# Altium PCB pcb_multilayer.pcbdoc (part 3 of 3)
Units mil, origin at the board's own origin, x right, y up, seen from the top; angles counter-clockwise.
Board outline 8907.73 x 8667.62 mil, 2 copper layers (Top Layer, Bottom Layer); 214 components, 207 nets, 845 pads, 446 vias.
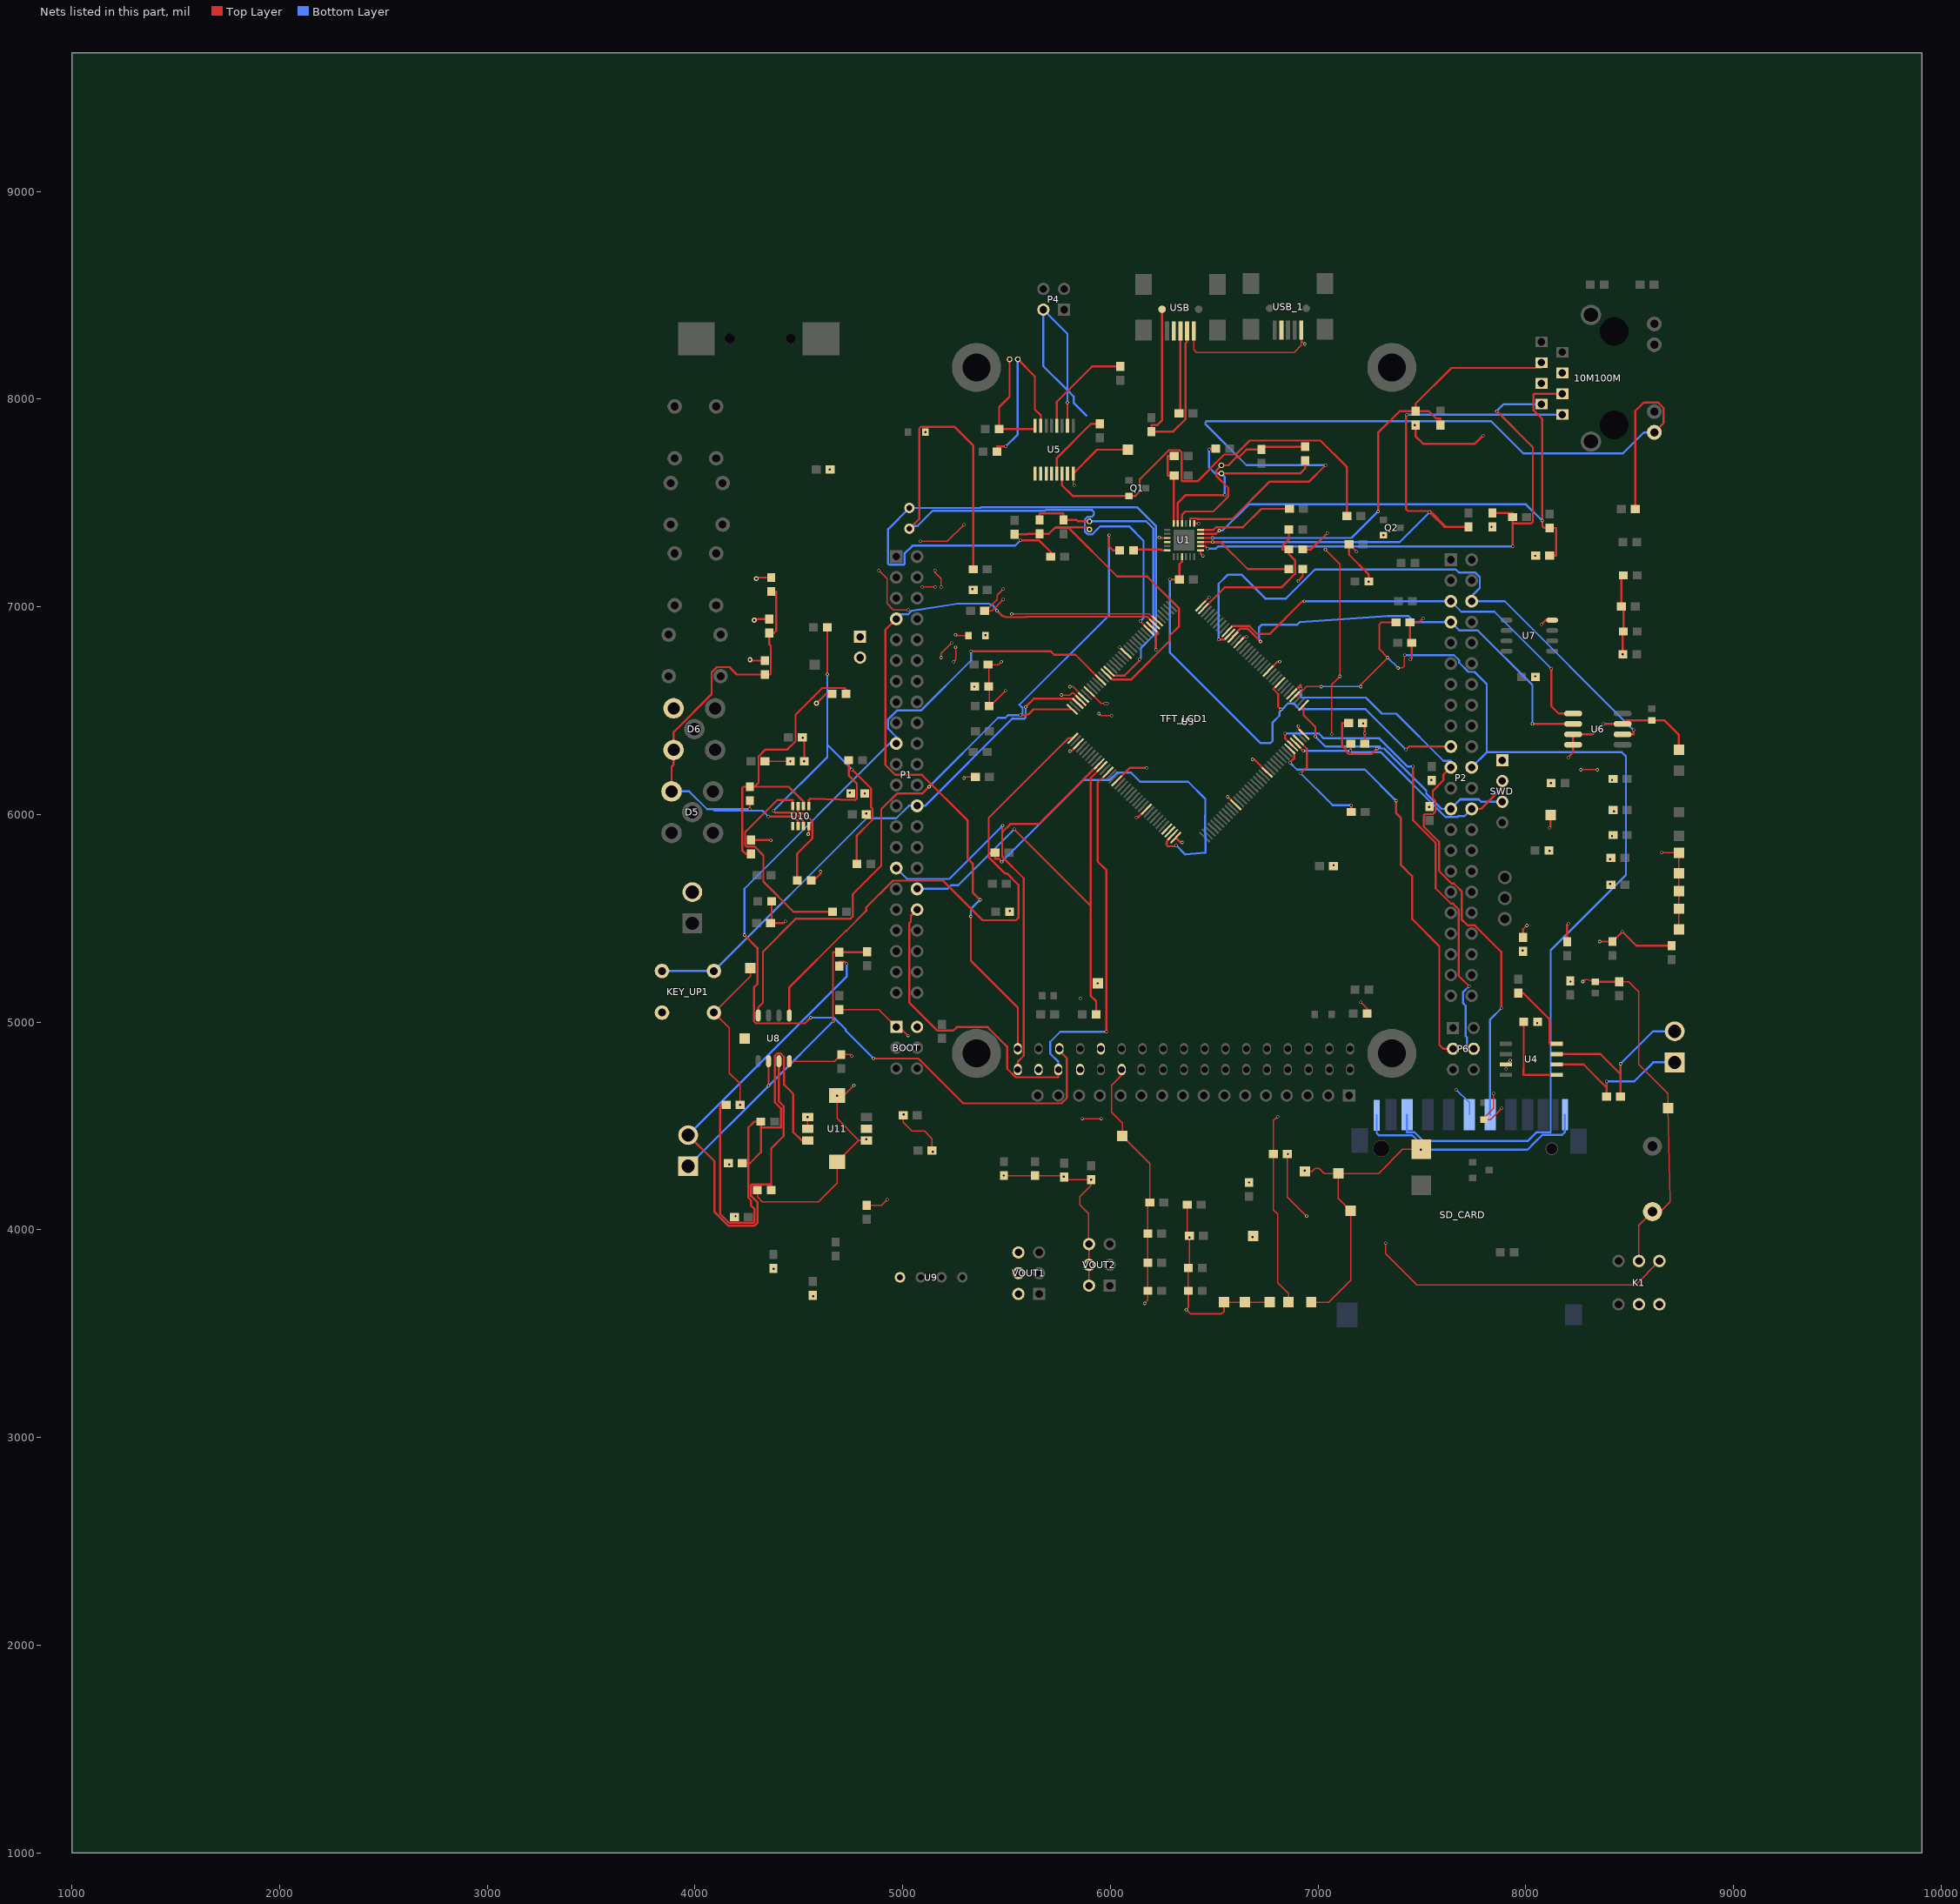
[diagram p3: the nets of this part, all layers, seen from the top]

## Via types
v1: diameter 15, hole 10, Top Layer to Bottom Layer, tented both sides, 426 vias
v2: diameter 24, hole 12, Top Layer to Bottom Layer, tented both sides, 20 vias

## Nets (pads, with @x,y where several pads share a name; then routed paths per layer and width w, separated by ;. In a path a pad name is that pad's centre, name@x,y a point inside that pad or via, vN(x,y) a via of type N, cw(c..) or ccw(c..) an arc to the next point about the centre after c; other vN are vias at no path point) (continued)
SDIO_D3: P2.22 R27.1 SD_CARD.1 U3.112 | length 5288.2
  Top Layer w6: U3.112@6886.97,6567.01 6897.01,6567.01 6915,6585 6925,6595 6945,6615 v1(7015,6615) ; v1(7205,6615) 7205,6625 v1(7335,6755) ; v1(7385,6705) 7405,6705 7415,6715 7415,6764 v1(7418,6767)
  Top Layer w8: v1(7335,6755) 7295,6795 7295,6915 7305,6925 R27.1@7374.99,6925
  Bottom Layer w6: v1(7015,6615) v1(7205,6615) ; v1(7335,6755) v1(7385,6705)
  Bottom Layer w10: v1(7418,6767) 7654,6767 7679,6742 7679,6731 7724,6686 7754,6686 7812,6628 7812,6299.1 7811.9,6299 ; SD_CARD.1@7428.55,4553.54 7428.55,4469 7464,4469 7504.96,4428.04 8011.04,4428.04 8053,4470 8120,4470 8120,5346 8482.02,5708.02 8482.02,6279.2 8462.22,6299 7811.9,6299 ; P2.22@7739.22,6226.32 7811.9,6299
SDIO_SCK: P2.21 SD_CARD.5 U3.113 | length 2961.1
  Top Layer w10: U3.113@6873.3,6580.21 6916,6622.91 v1(6916,6606) ; P2.21@7639.22,6226.32 7604,6191.1 7604,6164.5 7552.29,6112.79 7552.29,6077.94 7565.02,6065.22 7565.02,6013.02 7553,6001 7515,6001 7509.34,5995.34 7509.34,5940.66 7582,5868 7582,5728 7643,5667 7654,5667 7691,5630 7691,5495 7720,5466 7754,5466 7882,5338 v1(7882,5069)
  Bottom Layer w10: v1(6916,6606) 6916,6567.5 6921,6562.5 7230.12,6562.5 7307.64,6484.98 7376.56,6484.98 7603.54,6258 7639.22,6258 P2.21@7639.22,6226.32 ; SD_CARD.5@7828.55,4553.54 7828.55,5012.45 7882,5065.9 v1(7882,5069)
SGND: C61.1 C62.1 C63.1 C64.1 C65.2 C66.1 C67.1 C68.1 D6.2 D7.1 DC_IN.2 R55.2 R56.2 R59.1 U10.4 | length 4419.4
  Top Layer w10: v2(4265,6745) 4269.38,6740.62 C63.1@4337.11,6740.62 ; C67.1@4269.22,5876.32 4363.68,5876.32 v1(4365,5875) ; v2(4285,6935) 4290.62,6940.62 C62.1@4357.11,6940.62 ; v2(4295,7135) 4300.62,7140.62 C61.1@4367.11,7140.62 ; C66.1@4369.22,5581.32 4369.22,5481.32 C64.1@4364.22,5476.32 4426.32,5476.32 v1(4435,5485) ; R59.1@4517.11,6370.62 4526.22,6361.51 C65.2@4526.22,6256.32 ; v1(4545,5905) 4548.22,5908.22 U10.4@4548.22,5943.32 ; C68.1@4559.22,5681.32 4571.32,5681.32 4605,5715 v1(4605,5725) ; v2(4585,6535) 4630.62,6580.62 R56.2@4660.11,6580.62
  Mid-Layer 1 w10: D6.2@3897.11,6510.62 3897.11,6577.11 4045,6725 4245,6725 v2(4265,6745) ; DC_IN.2@3987.11,5625.62 4155.62,5625.62 4365,5835 v1(4365,5875) 4515,5875 v1(4545,5905) ; v2(4295,7135) 4285,7125 v2(4285,6935) 4265,6915 v2(4265,6745) ; v1(4435,5485) 4605,5655 v1(4605,5725) 4545,5785 v1(4545,5905) ; v2@4515,6365 4585,6435 v2(4585,6535) 4445,6535 4305,6675 4305,6685 4265,6725 v2(4265,6745) ; v1(4525,6255) 4625,6155 4625,5965 4565,5905 v1(4545,5905) ; v1(4817.11,6100.62) 4825,6085 v1(4825,6005) 4725,5905 v1(4545,5905)
  other v2: 4518.87,6368.86
SPEED_LED: 10M100M.9 R7.1 U1.2 | length 4494.6
  Top Layer w10: U1.2@6383.75,7401.32 6383.75,7425.32 6417,7425.32 6419.83,7422.49 6586.95,7422.49 6767.45,7603 6957,7603 v1(7036,7682) ; R7.1@8527.12,7470.62 8527.12,7942.12 8568.17,7983.17 8637.13,7983.17 8664,7956.3 8664,7885.01 10M100M.9@8618.61,7839.62
  Bottom Layer w10: v1(7036,7682) 6655,7682 6457,7880 6457,7887 6462.66,7892.66 7834.34,7892.66 7988.5,7738.5 8467.88,7738.5 8569,7839.62 10M100M.9@8618.61,7839.62
SPI1_MISO: P2.6 U3.134 U6.2 | length 2972.9
  Top Layer w10: v1(6521,6842) 6549.69,6842 U3.134@6575.49,6867.8 ; U6.2@8466.11,6385.62 8519,6385.62 v1(8519,6406)
  Bottom Layer w10: v1(6521,6842) 6521,7110.14 6565.55,7154.69 6630.31,7154.69 6745.57,7039.43 6845.43,7039.43 6985.46,7179.46 7662.92,7179.46 7677.07,7165.32 7755.87,7165.32 7778.49,7142.69 7778.49,7090.27 7739.22,7051 P2.6@7739.22,7026.32 7898.68,7026.32 v1(8519,6406)
SPI1_MOSI: P2.5 U3.135 U6.5 | length 2088.1
  Top Layer w10: U3.135@6561.83,6881 6587.83,6907 6669,6907 6707.18,6868.82 6766.82,6868.82 6924.32,7026.32 v1(6934.32,7026.32) ; v1(8123,6702) 8123,6521 8158.38,6485.62 U6.5@8228.11,6485.62
  Bottom Layer w10: v1(6934.32,7026.32) P2.5@7639.22,7026.32 7689.54,6976 7849,6976 v1(8123,6702)
SPI1_SCK: P2.7 U3.133 U6.6 | length 2096.5
  Top Layer w10: U3.133@6589.88,6853.9 6589.88,6858.38 6625.23,6893.73 6661.82,6893.73 v1(6723,6832.55) ; v1(8032,6435.62) U6.6@8228.11,6435.62
  Bottom Layer w10: v1(6723,6832.55) 6716.48,6839.07 6716.48,6901.07 6729.14,6913.73 6899.73,6913.73 6912.32,6926.32 7335,6955 7435,6955 7463.68,6926.32 P2.7@7639.22,6926.32 7679.54,6886 7768.54,6886 8032,6622.54 v1(8032,6435.62)
SWCLK: P2.25 R22.1 SWD.3 U3.109 | length 1703.6
  Top Layer w10: U3.109@6930.13,6525.33 6930.13,6478 6987,6421.13 v1(6987,6375) ; R22.1@7147.11,6440.62 7115.61,6440.62 7115.61,6329.51 7134.62,6310.5 7134.62,6303.5 7148.06,6290.06 7256.64,6290.06 v1(7283.9,6317.32)
  Bottom Layer w10: v1(6987,6375) 7035,6327 7298.6,6327 7298.6,6317.32 ; v1(7283.9,6317.32) 7298.6,6317.32 ; SWD.3@7887.11,6060.62 7785,6060.62 7773.62,6072 ; 7298.6,6317.32 7317.96,6317.32 7521,6114.28 7521,6099 7593.68,6026.32 P2.25@7639.22,6026.32 7684.9,6072 ; 7684.9,6072 7773.62,6072 ; 7684.9,6072 7685.9,6073 7772.62,6073 7773.62,6072
SWDIO: P2.26 R21.1 SWD.2 U3.105 | length 1270.2
  Top Layer w10: U3.105@6890.87,6343.6 v1(6928.47,6306) ; v1(7155,6306) 7157.11,6308.11 R21.1@7157.11,6340.62 ; P2.26@7739.22,6026.32 7785,6026.32 7887.11,6128.43 SWD.2@7887.11,6160.62
  Bottom Layer w10: v1(6928.47,6306) v1(7155,6306) 7161,6300 7301,6300 7613.92,5987.08 7669.98,5987.08 7674.22,5991.32 7704.22,5991.32 P2.26@7739.22,6026.32
T_CS: P1.7 TFT_LCD1.33 U3.7 | length 3784.9
  Top Layer w10: P1.7@4969.22,6941.32 4917,6889.1 4917,6237.8 4963.8,6191 5091.8,6191 5313,5969.8 5313,5787 5337,5763 5337,5624 v1(5372.51,5588.49) ; v1(5328,5509) 5328,5295 5554.22,5068.78 TFT_LCD1.33@5554.22,4871.32 ; v1(5454,6981) 5481,6954 5490.56,6954 5494.68,6949.88 5594.4,6949.88 5596.52,6952 6177.18,6952 U3.7@6212.55,6916.63
  Bottom Layer w10: P1.7@4969.22,6941.32 4969.22,6963 5025.45,6963 5043.45,6981 5265,7015 5415,7015 5435,7005 v1(5454,6981) ; v1(5328,5509) 5328,5543.98 v1(5372.51,5588.49)
T_MISO: P1.19 TFT_LCD1.29 U3.26 | length 5024.5
  Top Layer w10: v1(4238,5419) 4300.34,5356.66 4300.34,5183.34 4284.08,5167.08 4284.08,5003.26 4293.27,4994.07 4529.07,4994.07 v1(4556,5021) ; v1(4859,4825) 4860,4824 5076,4824 5291.57,4608.43 5764.46,4608.43 5790.63,4634.59 5790.63,4825.59 5754.22,4862 TFT_LCD1.29@5754.22,4871.32 ; v1(5328.91,6784.91) 5713.02,6784.91 5729.2,6768.73 5831.61,6768.73 U3.26@5952.75,6647.59
  Bottom Layer w10: v1(4238,5419) 4238,5642.32 4937,6341.32 P1.19@4969.22,6341.32 4969.22,6373 4929.62,6412.6 4929.62,6457.6 4972.02,6500 5087.22,6500 5328.91,6741.69 v1(5328.91,6784.91) ; v1(4556,5021) 4669,5021 4726,4964 4726,4958 v1(4859,4825)
T_MOSI: P1.36 TFT_LCD1.30 U3.49 | length 3171.4
  Top Layer w10: P1.36@5069.22,5541.32 5039,5511.1 5039,5483.5 5031.22,5475.72 5031.22,5093.85 5166.54,4958.54 5243.54,4958.54 5260.51,4975.51 5408.49,4975.51 5503,4881 5503,4775 5543.78,4734.22 5749.22,4734.22 TFT_LCD1.30@5749.22,4771.32 ; v1(5981,4953) 5981,5731 5939,5773 5939,6152.88 U3.49@5988.8,6202.68
  Bottom Layer w10: TFT_LCD1.30@5749.22,4771.32 5749.22,4809 5710.33,4847.89 5710.33,4904.89 5758.44,4953 v1(5981,4953)
T_PEN: P1.34 R14.2 U3.47 | length 2336.8
  Top Layer w10: v1(5536,5929) 5905,5560 ; R14.2@5931.22,5036.32 5931.22,5100 5905,5126.22 5905,5560 ; U3.47@5960.03,6230.46 5905,6175.43 5905,5560
  Bottom Layer w10: P1.34@5069.22,5641.32 5215.93,5641.32 5233.17,5658.56 5267.56,5658.56 5536,5927 v1(5536,5929)
T_SCK: P1.31 TFT_LCD1.34 U3.46 | length 2474.1
  Top Layer w10: v1(5481,5946) 5479,5944 5479,5916.73 ; TFT_LCD1.34@5554.22,4771.32 5554.22,4809.22 5582.5,4837.5 5582.5,5692.6 5481.63,5793.47 5481.63,5796.1 5479,5796.1 5479,5916.73 ; U3.46@5946.36,6243.66 5656.2,5953.5 5518.4,5953.5 5481.63,5916.73 5479,5916.73
  Bottom Layer w10: P1.31@4969.22,5741.32 5021.22,5689.32 5224.32,5689.32 v1(5481,5946)
TFT_LCD1_32: TFT_LCD1.32
TP24_P$1: TP24.P$1
TPRX+: 10M100M.3 C13.2 R4.1 U1.23 | length 3250.1
  Top Layer w10: U1.23@6434.22,7350.85 6508,7350.85 v1(6524,7366.85) ; v1(8079,7415) 8079,7904 ; R4.1@8114.22,7246.32 8145.72,7246.32 8145.72,7379.32 C13.2@8114.22,7379.32 8089,7379.32 8080,7388.32 8080,7904 8079,7904 ; 10M100M.3@8175.61,8025.62 8040.73,8025.62 8037.9,8022.79 8037.9,7946.1 8079,7905 8079,7904
  Bottom Layer w10: v1(6524,7366.85) 6540,7366.85 6665.93,7492.78 8001.22,7492.78 v1(8079,7415)
TPRX-: 10M100M.6 C14.2 R5.1 U1.22 | length 2414.8
  Top Layer w10: U1.22@6434.22,7331.16 v1(6491.69,7331.16) ; v1(7289,7459) 7289,7837.32 7393,7941.32 R5.1@7469.22,7941.32 ; C14.2@7589.22,7874.32 7589.22,7905.82 7568.72,7905.82 7533.22,7941.32 R5.1@7469.22,7941.32 ; 10M100M.6@8075.61,8175.62 8075.61,8150.1 7642.32,8150.1 7469.22,7977 R5.1@7469.22,7941.32
  Bottom Layer w10: v1(6491.69,7331.16) 7161.16,7331.16 v1(7289,7459)
TPTX+: 10M100M.1 C11.2 R2.1 U1.21 | length 3233.8
  Top Layer w10: U1.21@6434.22,7311.48 v1@6492,7311.48 ; v1(6492.48,7311) v1@6492,7311.48 ; R2.1@6859.22,7181.32 6661.16,7181.32 6531,7311.48 v1@6492,7311.48 ; v1(7428,7925.62) 7423.05,7920.67 7423.05,7470.27 7432.32,7461 7539.32,7461 7616,7384.32 ; v1(7537,7455) 7607.68,7384.32 7616,7384.32 ; C11.2@7724.22,7384.32 7616,7384.32
  Bottom Layer w10: v1(6492.48,7311) 7393,7311 v1(7537,7455) ; v1(7428,7925.62) 10M100M.1@8175.61,7925.62
TPTX-: 10M100M.2 C12.2 R3.1 U1.20 | length 2706
  Top Layer w10: U1.20@6434.22,7291.79 6457,7291.79 v1(6469.29,7279.5) ; R3.1@7839.22,7451.32 7937.22,7451.32 C12.2@7937.22,7431.32 7937.22,7401 ; v1(7860,7942) 8034,7768 8034,7408.78 8026.22,7401 7937.22,7401 ; v1(7937.22,7291) 7937.22,7401
  Bottom Layer w10: v1(6469.29,7279.5) 6507.98,7279.5 6519.48,7291 v1(7937.22,7291) ; v1(7860,7942) 7893.62,7975.62 10M100M.2@8075.61,7975.62
TXD: P4.2 U5.2 | length 1204.3
  Top Layer w10: U5.2@5793.22,7871.32 v1(5793.22,7983.05)
  Bottom Layer w10: v1(5793.22,7983.05) 5793.22,8042.67 ; 5885,7919.79 5823.03,7981.75 5823.03,8012.86 5793.22,8042.67 ; 5793.22,8042.67 5793.22,8314.52 P4.2@5677.12,8430.62 5677.12,8158.77 5793.22,8042.67
U1_4: C6.2 R10.1 U1.4 Y1.1 | length 931.1
  Top Layer w10: U1.4@6344.38,7401.32 6344.38,7442.38 6361,7459 6495.72,7459 6566.86,7530.14 6566.86,7573.14 6511,7629 6511,7657.8 Y1.1@6534.22,7681.02 6567.4,7681.02 6606.2,7719.82 6617.72,7719.82 6655.53,7757.62 C6.2@6727.11,7757.62 6727.11,7770.62 R10.1@6937.11,7770.62
U1_5: C7.2 R10.2 U1.5 Y1.2 | length 1097.1
  Top Layer w10: U1.5@6324.69,7401.32 6324.69,7500.69 6361,7537 v1(6551,7537) ; v1(6475,7757) 6475.72,7757 6475.72,7761.32 C7.2@6507.22,7761.32 ; Y1.2@6534.22,7641.62 6913.73,7641.62 6937.11,7665 R10.2@6937.11,7703.62
  Bottom Layer w10: v1(6475,7757) 6475,7671.62 6505,7641.62 Y1.2@6534.22,7641.62 6551,7624.84 v1(6551,7537)
U1_6: C1.2 C2.2 U1.6 | length 388
  Top Layer w10: U1.6@6305.01,7401.32 C2.2@6305.01,7631.32 ; C2.2@6307.22,7631.32 6307,7631.32 C2.2@6305.01,7631.32 ; C1.2@6307.22,7726.32 6275.72,7726.32 6275.72,7631.32 C2.2@6305.01,7631.32
U1_10: U1.10
U1_12: R1.2 U1.12 | length 169.1
  Top Layer w10: R1.2@6111.22,7271.32 6111.22,7275.89 6244.44,7275.89 6248.22,7272.11 U1.12@6274.22,7272.11
U1_24: R9.2 U1.24 | length 469.7
  Top Layer w10: U1.24@6434.22,7370.53 6496.68,7370.53 6508.5,7382.35 6637.82,7382.35 6726.79,7471.32 R9.2@6862.22,7471.32
U3_8: C20.2 U3.8 Y2.2 | length 3168.3
  Top Layer w10: v1(5566,7319) 5657,7319 5712.22,7263.78 C20.2@5712.22,7241.32 ; U3.8@6199.35,6902.96 6230.31,6872 6220,6861.69 v1(6220,6792)
  Bottom Layer w10: v1(5566,7319) 5541,7294 5047,7294 5008.22,7255.22 5008.22,7206.22 5003.98,7201.98 4934.98,7201.98 4930,7206.95 4930,7373.51 Y2.2@5032.11,7475.62 5374.62,7475.62 5378.16,7479.16 6127.84,7479.16 6220,7387 v1(6220,6792)
U3_9: C21.2 U3.9 Y2.1 | length 3244.8
  Top Layer w10: Y2.1@5032.11,7375.62 5080,7423.51 5080,7857.81 5089.19,7867 5248,7867 5340.11,7774.89 C21.2@5340.11,7180.62 ; v1(6144,6930.03) U3.9@6185.46,6888.57
  Bottom Layer w10: Y2.1@5032.11,7375.62 5032.11,7389 5071,7389 5144,7462 5685,7462 5688.54,7465.53 5911.43,7465.53 5920.98,7455.98 5920.98,7443.98 5910,7433 5890,7433 5876.87,7419.87 5876.87,7362.32 5889.59,7349.59 5913.6,7349.59 5951.07,7387.07 6090.07,7387.07 6159.5,7317.64 6159.5,6945.53 v1(6144,6930.03)
U3_23: C23.2 R16.2 U3.23 Y3.2 | length 1479.3
  Top Layer w10: R16.2@5659.22,7418.32 5659.22,7449.82 5774.22,7449.82 C23.2@5774.22,7418.32 5837,7418.32 5844.3,7411.02 Y3.2@5899.22,7411.02 ; U3.23@5993.73,6690.03 6015.76,6668 6068,6668 6140,6740 v1(6140,6748)
  Bottom Layer w10: Y3.2@5899.22,7411.02 5899.22,7412 6172.22,7412 6206.87,7377.35 6206.87,6860.91 6146.96,6801 6146.96,6754.96 v1(6140,6748)
U3_24: C22.2 R16.1 U3.24 Y3.1 | length 1704.1
  Top Layer w10: C22.2@5539.22,7349.32 5599,7349.32 5601,7351.32 5704,7351.32 5734.68,7381.02 ; Y3.1@5899.22,7371.62 5888.84,7382 5734.68,7382 5734.68,7381.02 ; U3.24@5980.53,6676.37 6007.9,6649 6099,6649 6286,6836 6286,6861 6330.74,6905.74 6330.74,6991.94 6176.68,7146 6032.72,7146 5797.7,7381.02 5734.68,7381.02
U3_71: C25.1 U3.71 | length 1812.9
  Top Layer w10: C25.1@5444.22,5816.32 5444.22,5787 5462,5787 v1(5477,5772) ; U3.71@6300.28,5901.89 6273.7,5875.31 6270.2,5855 6275.3,5846.2 6316,5846.2 v1(6316,5852)
  Bottom Layer w10: v1(5477,5772) 5871,6166 5996.46,6166 6031.11,6200.65 6099.85,6200.65 6143.4,6157.1 6374.62,6157.1 6457.24,6074.48 6457.24,6005.48 6455.45,5990.68 6458,5816 6361,5807 v1(6316,5852)
U3_106: C26.1 U3.106 | length 528.6
  Top Layer w10: U3.106@6904.76,6357.99 6946.32,6316.43 6946.32,6226.32 v1(6917,6197) ; C26.1@7159.22,6011.32 v1(7159.22,6044)
  Bottom Layer w10: v1(6917,6197) 7070,6044 v1(7159.22,6044)
U3_143: R19.1 R20.1 U3.143 | length 780.1
  Top Layer w10: U3.143@6448.17,6990.75 6550.42,7093 6823.84,7093 6888.92,7158.08 6888.92,7224.08 6859.22,7253.78 R20.1@6859.22,7276.32 6827.72,7276.32 6827.72,7292.72 6859.22,7324.22 R19.1@6859.22,7371.32
U4_5: R34.2 U4.5 | length 416.8
  Top Layer w10: R34.2@7990.12,5000.62 7990.12,4778.59 7988.5,4776.97 7988.5,4745.62 U4.5@8149.61,4745.62
U4_6: CAN.1 R29.1 U4.6 | length 724.8
  Top Layer w10: U4.6@8149.61,4795.62 8278,4795.62 8389.22,4684.4 ; R29.1@8389.22,4641.32 8389.22,4684.4 ; v1(8389.22,4715) 8389.22,4684.4
  Bottom Layer w10: v1(8389.22,4715) 8523,4715 8613.62,4805.62 CAN.1@8717.11,4805.62
U4_7: CAN.2 R29.2 U4.7 | length 829.9
  Top Layer w10: U4.7@8149.61,4845.62 8360,4845.62 8456.22,4749.4 ; R29.2@8456.22,4641.32 8456.22,4749.4 ; v1(8456.22,4799) 8456.22,4749.4
  Bottom Layer w10: v1(8456.22,4799) 8612.84,4955.62 CAN.2@8717.11,4955.62
U4_8: R35.2 U4.8 | length 354.5
  Top Layer w10: R35.2@7964.22,5139.32 7987.68,5139.32 8115,5012 8115,4895.62 U4.8@8149.61,4895.62
U5_4: C47.2 U5.4 | length 491.8
  Top Layer w10: U5.4@5742.22,7871.32 5742.22,7988 5911.84,8157.62 C47.2@6047.12,8157.62
U5_7: C53.1 U5.7 Y4.2 | length 876.9
  Top Layer w10: C53.1@5454.22,7746.32 5454.22,7772 v1(5496,7772) ; Y4.2@5553.92,8191.32 5636,8109.24 5636,7950.22 5665.22,7921 U5.7@5665.22,7871.32
  Bottom Layer w10: v1(5496,7772) 5553.92,7829.92 Y4.2@5553.92,8191.32
U5_8: C52.1 U5.8 Y4.1 | length 543.8
  Top Layer w10: Y4.1@5514.52,8191.32 5514.52,8011.3 5464.22,7961 C52.1@5464.22,7856.32 5637.22,7856.32 U5.8@5637.22,7871.32
U5_9: U5.9
U5_10: U5.10
U5_11: U5.11
U5_12: U5.12
U5_13: R30.1 U5.13 | length 350.5
  Top Layer w10: U5.13@5742.22,7641.32 5742.22,7716.54 5907,7881.32 R30.1@5949.22,7881.32
U5_14: Q1.2 R33.1 U5.14 | length 2085.9
  Top Layer w10: U5.14@5767.22,7641.32 5767.22,7585 5818.3,7533.92 Q1.2@6089.85,7533.92 6121,7533.92 6141,7553.92 6141,7613 6282.06,7754.06 6332.06,7754.06 6343,7743.12 6343,7609.41 6348.66,7603.75 6418.75,7603.75 6548,7733 6604,7733 6671.18,7800.18 7010.82,7800.18 7139.22,7671.78 R33.1@7139.22,7436.32
U5_15: U5.15
U8_6: R40.1 R43.2 RS485.1 U8.6 | length 1604
  Top Layer w10: v1(4354.22,4692.73) U8.6@4354.22,4811.32 ; v1(4664.5,5003.01) 4664.5,5334.82 4666,5336.32 R40.1@4694.22,5336.32 4829.22,5336.32 R43.2@4829.22,5338.32
  Bottom Layer w10: RS485.1@3967.11,4305.62 v1(4354.22,4692.73) v1(4664.5,5003.01)
U8_7: R39.1 R40.2 RS485.2 U8.7 | length 2813.3
  Top Layer w10: RS485.2@3967.11,4455.62 4094,4328.73 4094,4085.13 4159.72,4019.41 4286.72,4019.41 4300.15,4032.84 4300.15,4132.85 4270.25,4162.75 4270.25,4213.75 4274.92,4218.41 4365.7,4218.41 4367.11,4217 ; R39.1@4367.11,4190.62 4367.11,4217 ; U8.7@4404.22,4811.32 4404.22,4617.78 4426.85,4595.15 4426.85,4450.85 4367.11,4391.11 4367.11,4217 ; R40.2@4694.22,5269.32 4694.22,5291 4720,5291 v1(4731,5280)
  Bottom Layer w10: RS485.2@3967.11,4455.62 4731,5219.51 v1(4731,5280)
U10_1: U10.1
U10_2: C61.2 C62.2 C63.2 D5.2 D6.1 R53.1 U10.2 | length 2323.2
  Top Layer w10: D5.2@3887.11,6110.62 3887.11,6230 3897.11,6240 D6.1@3897.11,6310.62 3897.11,6396.11 4080.11,6579.11 4080.11,6683.49 4105.57,6708.95 4165.67,6708.95 4201,6673.62 C63.2@4337.11,6673.62 4360.62,6673.62 4364.86,6677.86 4364.86,6812.25 4357.11,6820 C62.2@4357.11,6873.62 4380.62,6873.62 4391,6884 4391,7073.62 C61.2@4367.11,7073.62 ; v1(4264,6025) 4264,6034.6 4264.22,6034.82 R53.1@4264.22,6066.32 ; v1(4353,5990) 4473,5990 4496.22,5966.78 U10.2@4496.22,5943.32
  Bottom Layer w10: D5.2@3887.11,6110.62 3972.38,6110.62 4058,6025 4093.62,6025 ; v1(4264,6025) 4093.62,6025 ; v1(4353,5990) 4325,6018 4093.62,6018 4093.62,6025
U10_3: C60.1 L2.1 U10.3 | length 1873.1
  Top Layer w10: v1(4378,6017) 4386,6009 4479,6009 4522.22,5965.78 U10.3@4522.22,5943.32 ; v1(4637,6675) 4637.11,6675.11 L2.1@4637.11,6900.62 ; v1(4756,6216) 4848,6124 4848,6033.61 4853.66,6027.95 4853.66,5973.05 4779.22,5898.61 C60.1@4779.22,5761.32
  Bottom Layer w10: v1(4378,6017) 4637,6276 4637,6335 ; v1(4637,6675) 4637,6335 ; v1(4756,6216) 4637,6335
U10_5: R51.2 U10.5 | length 466.8
  Top Layer w10: U10.5@4548.22,6039.32 4548.22,6069.32 4555,6075 4771.94,6069.32 4779.71,6077.1 4779.71,6148.29 4740.11,6187.89 R51.2@4740.11,6260.62
U10_6: C67.2 R53.2 R56.1 U10.6 | length 1507.6
  Top Layer w10: C67.2@4269.22,5809.32 4245,5809.32 4228.34,5825.98 4228.34,6127.66 4234,6133.32 R53.2@4264.22,6133.32 4286.32,6133.32 ; U10.6@4522.22,6039.32 4522.22,6061.78 4450.68,6133.32 4286.32,6133.32 ; R56.1@4727.11,6580.62 4727.11,6601 4719.33,6608.78 4613.33,6608.78 4484,6479.45 4484,6352 4445,6313 4340,6313 4306,6279 4306,6153 4286.32,6133.32
U10_7: C68.2 U10.7 | length 428.1
  Top Layer w10: C68.2@4492.22,5681.32 4492.22,5812 4564.7,5884.48 4564.7,5966.52 4527.22,6004 4507.22,6004 4496.22,6015 U10.7@4496.22,6039.32
U10_8: R54.2 U10.8 | length 1013.7
  Top Layer w10: U10.8@4470.22,6039.32 4470.22,6069.32 4396.31,6069.32 4241.36,5914.36 4241.36,5851.36 4247.72,5845 4286.72,5845 4329,5802.72 4329,5676 4473.68,5531.32 R54.2@4662.22,5531.32
U11_3: C70.1 R57.2 R58.1 U11.3 | length 2512.3
  Top Layer w10: R57.2@4150.11,4600.62 4121,4600.62 4121,4076.82 4164.83,4032.99 4281.83,4032.99 4286.78,4037.94 4286.78,4099.94 4269.72,4117 4269.72,4141.28 4256.99,4154.01 4256.99,4320.62 ; C70.1@4227.11,4320.62 4256.99,4320.62 ; U11.3@4542.49,4430.03 4513,4430.03 4473,4470.03 4473,4654 4429,4698 4429,4832 4412.46,4848.54 4395.46,4848.54 4384.15,4837.22 4384.15,4613.85 4413.61,4584.39 4413.61,4493 4317.11,4493 ; 4256.99,4320.62 4265,4320.62 4317.11,4372.73 4317.11,4493 ; 4256.99,4320.62 4256.99,4492 4285.61,4520.62 R58.1@4317.11,4520.62 4317.11,4493
U11_5: U11.5
USART2_RX: U3.37 U8.1 | length 2655
  Top Layer w10: U8.1@4454.22,5031.32 4454.22,5167.22 4726,5439 4728,5439 4824,5535 4824,5552 4952.69,5680.69 5194.12,5680.69 5384.79,5490.03 5544.93,5490.03 5556.95,5502.05 5556.95,5661.05 5502,5716 5492,5716 5414.22,5793.78 5414.22,5983.22 5797.62,6366.62 U3.37@5819.04,6366.62
USART2_TX: R1.1 U3.36 U8.4 | length 3680.7
  Top Layer w10: U8.4@4304.22,5031.32 4304.22,5070.32 4327,5093.1 4327,5338.1 4486.9,5498 4749,5498 4759,5508 4759,5615 4897,5753 4897,6025 4972,6100 5094,6100 v1(5127,6133) ; v1(5566.13,6476.87) 5588.87,6476.87 5594.5,6482.5 5606.5,6482.5 5629.88,6505.88 U3.36@5815.9,6505.88 ; v1(5994,7344) 5994,7290.04 6012.72,7271.32 R1.1@6044.22,7271.32
  Bottom Layer w10: v1(5127,6133) 5459,6465 5494.5,6465 5506.5,6477 5566.13,6477 v1(5566.13,6476.87) 5577.5,6488.25 5577.5,6512.5 5562,6528 5993,6959 5993,7344 v1(5994,7344)
USART3_RX: U3.70
USART3_TX: U3.69
USB_1_4: USB_1.4
USB_4: USB.4
USB_D+: P6.4 U3.104 | length 2285.5
  Top Layer w10: v1(6841.6,6390.5) 6841.6,6366 U3.104@6877.67,6329.93 ; v1(7457,6230) 7457,5972 7566,5863 7566,5644 7639,5571 7649,5571 7677.22,5542.78 7677.22,5222.78 v1(7727,5173)
  Bottom Layer w10: v1(6841.6,6390.5) 7002.5,6390.5 7027,6366 7295,6366 7431,6230 v1(7457,6230) ; v1(7727,5173) 7698.69,5144.69 7698.69,5090.31 7710,5079 7710,4933 7716.63,4926.37 7716.63,4871.32 P6.4@7749.22,4871.32
USB_D-: P6.3 U3.103 | length 2006.6
  Top Layer w10: U3.103@6863.78,6315.55 6886,6293.33 6886,6272 v1(6864,6250) ; v1(7375,6066) 7375,6007 7399,5983 7399,5756 7453,5702 7453,5496 7584,5365 7584,4890 7602.68,4871.32 P6.3@7649.22,4871.32
  Bottom Layer w10: v1(6864,6250) 6898,6216 7225,6216 v1(7375,6066)
USB_DM: R37.2 USB.2 | length 1244.9
  Top Layer w10: USB.2@6249.11,8432.62 6249.11,7898.11 6225,7874 6197.12,7874 R37.2@6197.12,7843.62 6302.62,7843.62 6362,7903 6362,8268 6369.11,8275.11 USB.2@6369.11,8328.62
USB_DP: R38.2 USB.3 | length 405
  Top Layer w10: R38.2@6330.11,7930.62 6337.11,7930.62 USB.3@6337.11,8328.62
VBAT: C43.2 D1.2 D2.2 U3.6 | length 2190.5
  Top Layer w6: v1(5155,7175) 5155,7165 5185,7135 v1(5185,7095) ; v1(5525,6965) 6135,6965 6185,6965 6218.99,6931.01 U3.6@6226.44,6931.01
  Mid-Layer 2 w6: v1@5105,7845 5155,7795 v1(5155,7175) ; v1(5335,7085) 5325,7095 v1(5185,7095) 5275,7005 5275,6955 5335,6895 5345,6895 5377.66,6862.34 v1(5397.66,6862.34) 5405,6855 5455,6855 5525,6925 v1(5525,6965)
  other v1: 5108.76,7841.24
VBTN: C65.1 D7.2 F1.2 K1.3 K1.4 L3.2 | length 6376.2
  Top Layer w6: L3.2@4336.22,6256.32 v1(4459.22,6256.32) ; v1(5865,4535) v1(5955,4535) ; F1.2@6851.99,4365 6851.99,4158.01 v1(6945,4065) ; v1(7325,3935) 7325,3885 7475,3735 8529.09,3735 K1.4@8643.42,3849.33
  Mid-Layer 2 w6: v1(4459.22,6256.32) 4463.68,6256.32 4585,6135 4715,6135 v1(4745,6105) 4745,5865 4915,5695 5115,5695 5145,5665 5145,5275 5495,4925 5495,4605 5565,4535 v1(5865,4535) ; v1(5955,4535) 6755,4535 6855,4435 v1(6855,4365) ; v1(6945,4065) 6945,4035 6965,4015 7245,4015 v1(7325,3935) ; K1.3@8643.42,3640.67 K1.4@8643.42,3849.33
VCC3.3: 3.3V.P$1 BOOT.1 BOOT.2 C3.2 C8.2 C15.2 C16.2 C19.2 C29.2 C30.2 C31.2 C32.2 C33.2 C34.2 C35.2 C36.2 C37.2 C38.2 C39.2 C40.2 C41.2 C46.1 C50.2 C51.2 C54.2 C57.1 C59.2 C70.2 C71.2 D1.1 KEY_UP1.1 L1.2 Q2.2 R13.2 R17.2 R18.2 R20.2 R21.2 R22.2 R25.2 R26.2 R27.2 R28.2 R31.2 R32.2 R34.1 R41.1 R42.1 R44.2 R45.2 R46.2 R48.2 R50.2 R57.1 SD_CARD.4 SWD.1 TFT_LCD1.24 TFT_LCD1.25 TP4.P$1 TP8.P$1 TP9.P$1 TP11.P$1 TP12.P$1 TP14.P$1 TP19.P$1 TP20.P$1 TP21.P$1 TP22.P$1 TP23.P$1 TP27.P$1 TP29.P$1 U1.9 U3.17 U3.30 U3.39 U3.52 U3.62 U3.72 U3.84 U3.95 U3.108 U3.121 U3.131 U3.144 U6.3 U6.7 U6.8 U7.8 U9.1 U11.1 U11.2 VOUT1.2 VOUT1.4 VOUT1.6 | length 31328.6
  Top Layer w6: v1(4217.11,4600.62) 4217.11,4702.89 4165,4755 4165,4971.73 KEY_UP1.1@4091.11,5045.62 4267.11,5221.62 TP20.P$1@4267.11,5260.62 ; U11.2@4542.49,4486.32 v1(4542.49,4542.61) ; C51.2@4694.22,5059.32 4886.22,5059.32 BOOT.1@4969.22,4976.32 4983.68,4976.32 v1(5025,4935) ; C59.2@4827.11,4117.62 4897.62,4117.62 v1(4925,4145) ; C50.2@5002.22,4551.32 5002.22,4517.78 5045,4475 5105,4475 5141.22,4438.78 R50.2@5141.22,4381.32 ; v1(5245,6735) 5255,6745 v1(5255,6805) ; v1(5255,6865) 5259.38,6860.62 D1.1@5315.81,6860.62 ; v1(5295,6175) 5300.62,6180.62 R45.2@5350.11,6180.62 ; U3.30@5898.56,6591.48 5955.04,6535 v1(5975,6535) ; TFT_LCD1.24@6054.22,4771.32 6054.22,4744.22 6005,4695 6005,4565 6057.11,4512.89 TP29.P$1@6057.11,4450.62 6190.11,4317.62 C36.2@6190.11,4130.62 6180.11,4120.62 C35.2@6180.11,3980.62 C34.2@6180.11,3840.62 C33.2@6180.11,3705.62 6180.11,3660.11 v1(6165,3645) ; C54.2@6370.11,4120.62 6370.11,3980.62 C32.2@6380.11,3970.62 6380.11,3820.62 C31.2@6375.11,3815.62 C30.2@6375.11,3705.62 ; U3.144@6434.5,7003.95 6434.5,7004.5 v1(6475,7045) ; TP8.P$1@6547.11,3650.62 TP21.P$1@6647.11,3650.62 TP14.P$1@6767.11,3650.62 ; v1(7205,5095) 7236.22,5063.78 R25.2@7236.22,5041.32 ; v1(8265,6215) v1(8345,6215) ; v1(8655,5815.62) TP22.P$1@8737.11,5815.62 TP19.P$1@8737.11,5715.62 TP11.P$1@8737.11,5630.62 TP9.P$1@8737.11,5545.62 TP4.P$1@8737.11,5445.62
  Top Layer w8: C30.2@6375.11,3705.62 6375.11,3625.11 v1(6365,3615) 6385,3595 6535,3595 6547.11,3607.11 TP8.P$1@6547.11,3650.62
  Top Layer w10: v1(5805,6305) 5812.57,6305 U3.39@5847.09,6339.52 ; U3.52@6031.24,6161.69 6031.69,6161.69 6095,6225 v1(6175,6225) ; v1(6045,6805) U3.17@6075.7,6774.92 ; v1(6125,5985) 6133.11,5985 U3.62@6172.95,6024.84 ; v1(6235,7335) 6238.84,7331.16 U1.9@6274.22,7331.16 ; U3.72@6314.66,5888 6337.66,5865 v1(6345,5865) ; v1(6565,6085) U3.84@6603.97,6046.51 ; U3.131@6617.94,6826.81 6646.13,6855 v1(6655,6855) ; v1(6685,6265) 6692.33,6265 U3.95@6754.72,6202.61 ; U3.121@6759.65,6689.97 6804.68,6735 v1(6815,6735) ; v1(6905,6425) 6905,6412.89 U3.108@6931.85,6386.04 ; R20.2@6926.22,7276.32 6966.32,7276.32 v1(7045,7355) ; R42.1@7147.11,7303.16 v1(7185,7265) ; R42.1@7149.22,7301.32 7149.22,7250.78 7244.22,7155.78 v1(7244.22,7121.32) ; R22.2@7214.11,6440.62 7224.11,6430.62 v1(7224.11,6389) R21.2@7224.11,6340.62 ; v1(7445,6745) 7451.22,6751.22 R28.2@7451.22,6826.32 7441.99,6835.55 R27.2@7441.99,6925 7485,6925 v1(7505,6945) ; L1.2@7987.11,5407.62 7987.11,5447.11 v1(8005,5465) ; v1(8075,6915) 8095.62,6935.62 U7.8@8127.11,6935.62 ; v1(8115,5935) 8119.22,5939.22 TP12.P$1@8119.22,5996.32 ; C57.1@8199.22,5386.32 8199.22,5469.22 v1(8205,5475) ; v1(8205,6275) 8228.11,6298.11 U6.8@8228.11,6335.62 U6.7@8228.11,6385.62 8322.11,6385.62 8347.11,6410.62 8372.11,6435.62 U6.3@8466.11,6435.62 8483.56,6453.07 C19.2@8607.11,6453.07 8666.93,6453.07 8737.11,6382.89 3.3V.P$1@8737.11,6310.62 ; v1(8467.11,6770.62) 8467.11,6877.62 C41.2@8470.11,6880.62 8470.11,6990.62 C40.2@8460.11,7000.62 8460.11,7140.62 C39.2@8470.11,7150.62
  Mid-Layer 2 w6: KEY_UP1.1@3841.11,5045.62 KEY_UP1.1@4091.11,5045.62 ; 4155,4315 4155,4135 4195,4095 v1(4195,4065) ; v1(4165,4315) 4165,4555 v1@4215,4605 ; 4185,4065 4185,3915 4287.89,3812.11 v1(4377.89,3812.11) ; v1(4217.11,4600.62) 4479.38,4600.62 4535,4545 ; v1@4375,3815 4395,3795 4395,3755 4470.33,3679.67 v1(4569.67,3679.67) ; v1@4565,3675 4585,3695 4965,3695 4987.11,3717.11 U9.1@4987.11,3770.62 ; v1@4645,7665 4885,7425 5055,7425 5115,7365 5115,7225 5095,7205 5095,7185 5125,7155 5125,7005 5265,6865 5265,6835 5255,6825 v1(5255,6805) ; BOOT.1@4969.22,4976.32 BOOT.2@5069.22,4976.32 ; v1(5005,4555) 5025,4575 v1(5025,4935) ; v1(5145,4375) 5145,4225 5065,4145 v1(4925,4145) 4995,4075 4995,3778.51 U9.1@4987.11,3770.62 ; v1(5245,6735) 5245,6715 v1(5345,6615) 5345,6485 5365,6465 5365,6145 5345,6125 5315,6125 5295,6145 v1(5295,6175) ; 5252.72,6877.28 5252.72,6867.28 v1(5255,6865) ; VOUT1.6@5557.11,3890.62 VOUT1.4@5557.11,3790.62 ; v1(5805,6305) 5555,6305 5485,6235 5325,6235 5295,6205 v1(5295,6175) ; v1@5935,5185 5585,5535 v1(5515,5535) 5545,5565 5545,5835 5425,5955 5295,6085 v1(5295,6175) ; v1(5939.23,5186.32) 5954.22,5171.33 TFT_LCD1.25@5954.22,4871.32 5965,4835 TFT_LCD1.24@6054.22,4771.32 ; v1(5975,6535) v1(5985,6535) ; v1(6165,3645) 6145,3625 5605,3625 5557.11,3672.89 VOUT1.2@5557.11,3690.62 VOUT1.4@5557.11,3790.62 ; v1(6380.11,3963.15) 6380.11,3939.89 6425,3895 6655,3895 6685,3925 v1(6685,3965) 6685,4015 6735,4065 6735,4215 6735,4225 6725,4235 6675,4235 v1@6665,4225 ; v1(7205,5095) 7215,5105 7325,5105 7395,5035 7455,5035 7545,4945 7545,4775 7645,4675 v1(7665,4675) 7735,4675 7805,4745 7805,4875 7865,4935 7995,4935 v1(8055,4995) ; v1(8205,6275) v1(8265,6215) ; v1(8345,6215) 8395,6165 v1(8415,6165) 8425,6155 v1(8425,6015) ; 8415,6015 v1(8415,5895) 8415,5865 8464.38,5815.62 v1(8655,5815.62) ; U9.1@4987.11,3770.62 5020.62,3770.62 5085,3835 5512.73,3835 VOUT1.4@5557.11,3790.62
  Mid-Layer 2 w8: v1(6165,3645) 6165,3635 6195,3605 6355,3605 v1(6365,3615)
  Mid-Layer 2 w10: v1(6045,6805) 6035,6815 6025,6815 5985,6775 v1(5985,6535) 5985,6365 5945,6325 5865,6245 5835,6245 5795,6285 5795,6295 v1(5805,6305) 5885,6305 6005,6185 6055,6185 6355,5885 6355,5875 v1(6345,5865) 6345,5935 6495,6085 v1(6565,6085) 6575,6085 6665,6175 6665,6255 6675,6265 v1(6685,6265) 6845,6265 6915,6335 6995,6335 7025,6365 7025,6425 7005,6445 6925,6445 v1(6905,6425) ; v1(6125,5985) 6115,5995 6115,6015 6175,6075 6185,6215 v1(6175,6225) ; v1(6235,7335) 6205,7305 6205,7285 6285,7205 6335,7205 6405,7135 6405,7095 6455,7045 v1(6475,7045) 6485,7055 6655,6885 v1(6655,6855) 6675,6875 6725,6875 6815,6785 v1(6815,6735) 6835,6715 6835,6655 6905,6585 v1(6905,6425) ; v1(7045,7355) 7165,7355 7195,7325 7195,7275 v1(7185,7265) 7285,7265 7305,7285 7305,7335 v1(7315,7345) ; v1(7075,5755) 7085,5765 7355,5765 7535,5945 v1(7535,6035) 7545,6045 v1(7545,6165) ; v1@7215,6435 7445,6665 v1(7445,6745) ; v1(7217.37,6437.36) 7012.64,6437.36 6985,6465 6945,6465 v1(6905,6425) ; v1(7224.11,6389) 7281,6389 7405,6265 7525,6265 7535,6265 7555,6245 7555,6175 v1(7545,6165) ; v1(7244.22,7121.32) 7458.68,7121.32 7525,7055 7525,6965 v1(7505,6945) ; v1(8055,4995) 8145,4995 8215,5065 v1(8215,5195) 8395,5375 8395,5395 8315,5475 v1(8205,5475) 8175,5505 8055,5505 8015,5465 v1(8005,5465) 8005,5715 v1(8115,5825) v1(8115,5935) 8105,5935 8055,5985 8055,6085 v1@8125,6155 ; v1(8075,6915) 8045,6885 v1(8045,6665) 8085,6625 8085,6365 8175,6275 v1(8205,6275) 8120.9,6190.9 v1(8120.9,6150.9) 8011.17,6260.62 SWD.1@7887.11,6260.62 7887.11,6257.11 7795,6165 v1(7545,6165) ; v1(8375,6435) 8345,6465 8345,6545 8467.11,6667.11 v1(8467.11,6770.62)
  Bottom Layer w6: v1(7665,4675) 7728.55,4611.45 SD_CARD.4@7728.55,4553.54
  other v1: 6667.37,4227.36 4648.44,7661.56
VCC5: C18.1 C44.1 C45.1 C48.2 C49.2 C55.1 C69.2 D4.2 D9.2 FMQ1.1 K1.2 K1.5 R39.2 TFT_LCD1.28 TP13.P$1 TP15.P$1 TP16.P$1 TP18.P$1 TP26.P$1 TP28.P$1 U4.3 U5.16 U8.8 U11.6 U11.7 U11.8 VOUT2.2 VOUT2.4 VOUT2.6 | length 14973.9
  Top Layer w6: R39.2@4300.11,4190.62 4300.11,4159.89 4325,4135 4595,4135 4684.22,4224.22 U11.8@4684.22,4326.87 4787.38,4430.03 U11.6@4825.95,4430.03 4789.97,4430.03 4684.22,4535.78 v1(4684.22,4645.77) 4715.77,4645.77 v1(4765,4695) ; U8.8@4454.22,4811.32 4672.22,4811.32 C69.2@4704.22,4843.32 4746.68,4843.32 v1(4755,4835) ; v1(4885,7175) 4925,7135 4925,7015 4955,6985 v1(5025,6985) ; v1(5085,7315) 5215,7315 v1(5295,7395) ; v1(5185,6755) 5185,6775 v1(5235,6825) ; v1(5487.11,4260.62) C45.1@5637.11,4260.62 5770.11,4260.62 C48.2@5777.11,4253.62 5790.11,4240.62 v1(5907.11,4240.62) ; U5.16@5821.22,7641.32 5821.22,7588.78 v1(5825,7585) ; VOUT2.6@5895,3925 5895,4077.27 5852.89,4119.38 5852.89,4159.38 5905,4211.49 C44.1@5905,4235 ; VOUT2.2@5897.11,3730.62 VOUT2.4@5897.11,3830.62 VOUT2.6@5897.11,3930.62 ; TP26.P$1@6937.11,4280.62 6970.62,4280.62 6985,4295 7005,4295 7029.38,4270.62 TP28.P$1@7097.11,4270.62 ; TP18.P$1@6967.11,3650.62 7050.62,3650.62 7157.11,3757.11 TP16.P$1@7157.11,4090.62 7097.11,4150.62 TP28.P$1@7097.11,4270.62 ; D9.2@7497.11,4387.62 7407.62,4387.62 7290.62,4270.62 TP28.P$1@7097.11,4270.62 ; v1(7845,4655) 7845,4585 7799.22,4539.22 D4.2@7799.22,4530.03 7830.03,4530.03 v1(7885,4585) ; v1(7905,4775) U4.3@7904.61,4795.62 7905.62,4795.62 v1(7925,4815) ; v1(8275,5195) 8285,5205 8295,5205 C18.1@8334,5194 ; C49.2@8449.22,5193.32 8496.68,5193.32 8545,5145 8545,4795 8685,4655 TP13.P$1@8685,4585 8695,4145 8695,4135 8647,4087 FMQ1.1@8610,4087 8545,4022 K1.5@8545,3849.33
  Top Layer w10: U5.16@5821.22,7641.32 5936.22,7756.32 TP15.P$1@6084.22,7756.32 ; C18.1@8334.22,5193.88 C49.2@8449.22,5193.32
  Mid-Layer 2 w6: v1(4755,4835) 4765,4825 v1(4765,4695) ; v1(4825,4435) 4975,4425 4985,4435 5165,4435 5339.38,4260.62 v1(5487.11,4260.62) ; v1(4885,7175) 4885,7275 4925,7315 v1(5085,7315) ; v1(5025,6985) 5105,6985 5215,6875 5235,6875 v1(5235,6825) ; v1(5185,6755) 5155,6725 5115,6685 5035,6685 5025,6675 5025,5825 5055,5795 5095,5795 5125,5765 5255,5635 5255,5385 5285,5355 5645,5355 5855,5145 v1(5855,5115) 5904.23,5065.77 5904.23,4804.23 ; v1(5295,7395) 5375,7395 5545,7565 5805,7565 v1(5825,7585) ; v1(5775,4255) 5785,4245 5825,4245 5845,4265 5845,4395 5895,4445 5895,4685 5854.22,4725.78 TFT_LCD1.28@5854.22,4771.32 5871.32,4771.32 5905,4805 ; v1(5907.11,4240.62) 6580.62,4240.62 6615,4275 6925,4275 v1(6935,4285) ; v1(7495,4385) 7505,4395 7645,4395 7735,4485 7735,4645 7765,4675 7835,4675 7845,4665 v1(7845,4655) ; v1(7885,4585) 7885,4755 v1(7905,4775) ; v1(7925,4815) 8045,4815 8295,5065 8295,5145 8275,5165 v1(8275,5195) ; K1.2@8545,3640.67 K1.5@8545,3849.33
VCC_3.3: 10M100M.4 10M100M.5 C4.2 C5.2 C9.2 C10.2 L1.1 R2.2 R3.2 R4.2 R5.2 U1.1 U1.19 | length 6974.9
  Top Layer w10: U1.1@6403.44,7401.32 v1(6425,7401.32) ; U1.19@6434.22,7272.11 6434.22,7255.78 v1(6445,7245) ; v1(6905,7125) 6926.22,7146.22 R2.2@6926.22,7181.32 ; R5.2@7469.22,7874.32 7469.22,7820.78 7505,7785 7755,7785 v1(7795,7825) ; v1(8355,5387.62) C10.2@8417.11,5387.62 v1(8465,5435) 8532.38,5367.62 C5.2@8702.11,5367.62
  Mid-Layer 2 w10: v1(6425,7401.32) 6458.68,7401.32 6485,7375 6525,7335 6525,7255 6515,7245 v1(6445,7245) 6445,7215 6485,7175 6675,7175 6735,7115 6895,7115 v1(6905,7125) 7215,7125 7355,7265 7355,7765 v1(7465,7875) 7505,7875 7835,7545 v1(7835,7385) 7835,7315 7925,7225 8025,7225 v1(8045,7245) 8115,7245 8305,7055 8305,5835 8345,5795 8395,5795 v1(8405,5785) v1(8405,5665) 8405,5495 v1(8465,5435) ; v1(7795,7825) 8045.62,8075.62 10M100M.4@8075.61,8075.62 8125.61,8125.62 10M100M.5@8175.61,8125.62 ; v1(7985,5345) 7965,5325 7965,5285 7975,5275 8015,5275 8075,5335 8127.62,5387.62 v1(8355,5387.62)
VDDA: C27.2 C28.2 P5.2 R18.1 U3.33 | length 1513.9
  Top Layer w6: v1(5475,6735) 5461.32,6721.32 C27.2@5411.22,6721.32 5414.22,6718.32 R18.1@5414.22,6616.32 5416.22,6614.32 C28.2@5416.22,6521.32 5421.32,6521.32 v1(5495,6595) ; v1(5765,6575) 5805,6575 5815,6585 5821.62,6585 U3.33@5857.58,6549.04
  Mid-Layer 2 w6: P5.2@4795,6755 4875,6755 4905,6785 5245,6785 5265,6765 5355,6765 5375,6785 5445,6785 5475,6755 v1(5475,6735) ; v1(5495,6595) 5660.46,6590.46 5675,6585 5745,6595 v1(5765,6575)
VREF+: C42.2 P5.1 U3.32 | length 2826.9
  Top Layer w6: v1(5095,7095) v1(5155,7095) ; v1(5485,7035) 5430.62,6980.62 C42.2@5394.11,6980.62 5400.62,6980.62 5455,7035 5455,7055 v1(5485,7085) ; v1(5805,6615) 5818.49,6615 U3.32@5870.78,6562.71 ; v1(5945,6485) 5955,6475 v1(6005,6475)
  Mid-Layer 2 w6: P5.1@4795,6855 4795,6915 4875,6995 4985,6995 5025,7035 5025,7055 5065,7095 v1(5095,7095) ; v1(5155,7095) 5175,7115 5465,7115 5485,7095 v1(5485,7085) ; v1(5485,7035) 5515,7035 5555,6995 6175,6995 6195,6975 6195,6665 6065,6535 v1(6005,6475) ; v1(5805,6615) 5785,6595 5785,6585 5885,6485 v1(5945,6485)
VUSB: F1.1 TP17.P$1 USB.1 USB_1.1 | length 5660.9
  Top Layer w6: USB.1@6401.11,8328.62 6401.11,8238.89 6415,8225 6885,8225 6919,8259 USB_1.1@6919,8333 6919,8281 v1(6935,8265) ; v1(6805,4545) 6784.99,4524.99 F1.1@6784.99,4365 6784.99,4095.01 6805,4075 6805,3745 6857.11,3692.89 TP17.P$1@6857.11,3650.62 ; v1(7035,7275) 7105,7205 v1(7105,6665) 7065,6625 v1(7065,6385)
  Mid-Layer 2 w6: v1(6805,4545) 6805,5965 7005,6165 7055,6165 7075,6185 7075,6375 v1(7065,6385) ; v1(6935,8265) 7005,8195 7005,7365 7035,7335 v1(7035,7275)
  other v1: 7105,6665
W_RESET: P2.19 R8.2 U1.15 U3.117 | length 2447.9
  Top Layer w10: v1(6287,7131.32) R8.2@6332.22,7131.32 6332.22,7204.84 6344.38,7217 U1.15@6344.38,7241.32 ; U3.117@6816.47,6635.09 6785,6603.62 6808,6580.62 6808,6519 v1(6821,6506) ; v1(7423,6312) 7437.32,6326.32 P2.19@7639.22,6326.32
  Bottom Layer w10: v1(6287,7131.32) 6287,6778 6721,6344 6771,6344 6781,6354 6781,6442.57 6814,6475.57 6814,6492.57 v1@6827.43,6506 ; v1(6821,6506) v1@6827.43,6506 ; v1(7423,6312) 7228,6507 6910,6507 6882.42,6534.58 6856.01,6534.58 v1@6827.43,6506
WK_UP: KEY_UP1.2 P1.26 U3.34 | length 2587.3
  Top Layer w10: v1(5592,6518) 5630.73,6556.73 5821.62,6556.73 U3.34@5843.69,6534.66
  Bottom Layer w10: KEY_UP1.2@3841.11,5245.62 KEY_UP1.2@4091.11,5245.62 4826.49,5981 4969.15,5981 5029.47,6041.32 P1.26@5069.22,6041.32 5107.79,6041.32 5530.34,6463.87 5533.17,6461.05 5586.55,6461.05 5592,6466.5 v1(5592,6518)
WP: SD_CARD.11 | length 1240.2
  Bottom Layer w10: SD_CARD.11@7282.21,4550.87 7282.21,4465 7292.21,4455 7453,4455 7490.48,4417.52 7523,4385 8008,4385 8040.52,4417.52 8079,4456 ; SD_CARD.11@8188.55,4553.54 8188.55,4470.55 8175,4457 ; 8079,4456 8080,4457 8175,4457 ; 8079,4456 8174,4456 8175,4457
pads on no net: 10M100M.15 10M100M.16 BAT.0 D5.3 D5.4 D5.5 D6.3 D6.4 D6.5 SD_CARD.0 TFT_LCD1.100 TFT_LCD1.101 TFT_LCD1.102 TFT_LCD1.103 USB. USB.6 USB.7 USB.8 USB.9 USB_1. USB_1.6 USB_1.7 USB_1.8 USB_1.9

## Polygon pours and split planes (outlines as drawn)
VCC3.3 on Bottom Layer (solid): 3705,8725 8835,8725 8975,8585 8975,3415 8945,3385 3695,3385 3665,3415 3675,3415 3715,3455
VDDA on Mid-Layer 1 (solid): 3655,8805 9035,8805 9075,8845 9075,3215 9015,3155 3605,3155 3475,3285 3495,3285
GND on Top Layer (solid): 3685,8725 8855,8725 8955,8625 8955,3425 8915,3385 3755,3385 3665,3475

## Keep-outs
Keep-Out Layer:
  lines w10: 3779.63,3667.48 ccw(c3937.11,3667.48) 3937.11,3510 ; 3779.63,8470.62 cw(c3937.11,8470.62) 3937.11,8628.1 ; 8740.25,3510 ccw(c8740.25,3667.48) 8897.73,3667.48 ; 8740.25,8628.1 cw(c8740.25,8470.62) 8897.73,8470.62

## Silkscreen, mask and mechanical layers (free items; w line width, h text height)
Mechanical 1:
  lines w0.5: 5453.86,5333.8 5453.88,5333.82 ; 6203.86,6081.61 6203.88,6081.63
Document:
  lines w10: 1505,1505 9402.73,1505 9402.73,9162.62 1505,9162.62 1505,1505

## Text inside footprints (layer, text, board x,y; h text height)
BOOT: Top Overlay "1" at 4974.22,5056.32 h50 r90; Top Overlay "2" at 5074.22,5076.32 h50 r90
P4: Top Overlay "1" at 5772.11,8350.62 h50 r270; Top Overlay "2" at 5672.11,8330.62 h50 r270
P6: Top Overlay "1" at 7654.22,5051.32 h50 r90; Top Overlay "2" at 7754.22,5071.32 h50 r90
VOUT1: Top Overlay "1" at 5652.11,3610.62 h50 r270; Top Overlay "2" at 5552.11,3590.62 h50 r270
VOUT2: Top Overlay "1" at 5992.11,3650.62 h50 r270; Top Overlay "2" at 5892.11,3630.62 h50 r270